# Altium PCB Datalogger_v3.PcbDoc
Units mm, origin at the board's own origin, x right, y up, seen from the top; angles counter-clockwise.
Board outline 73.03 x 72.52 mm, 2 copper layers (Top Layer, Bottom Layer); 8 components, 12 nets, 71 pads, 2 vias.
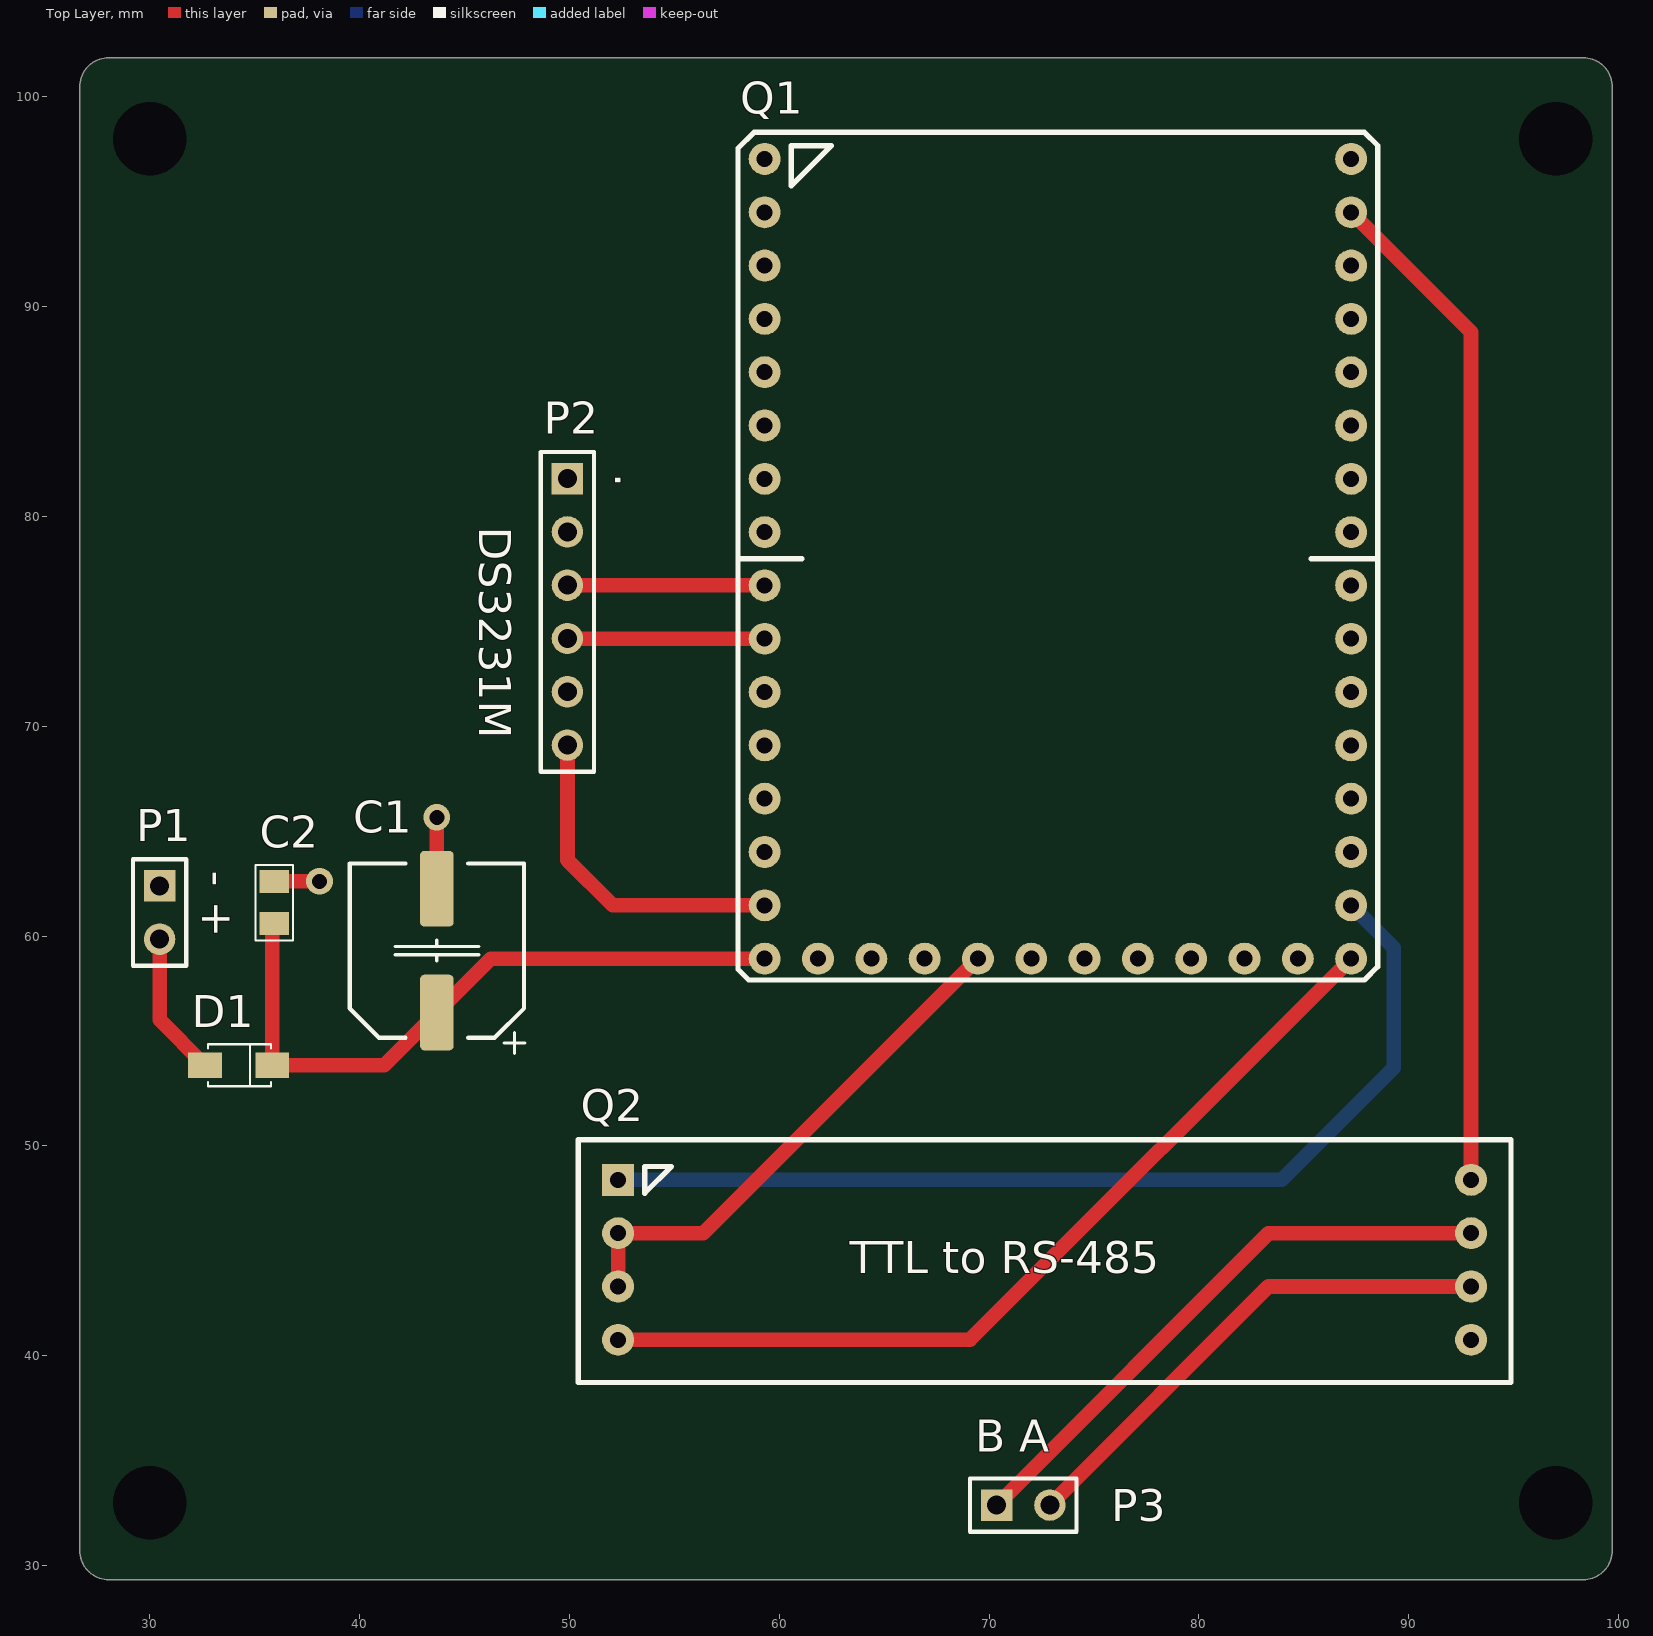
[diagram p0: Top Layer view]
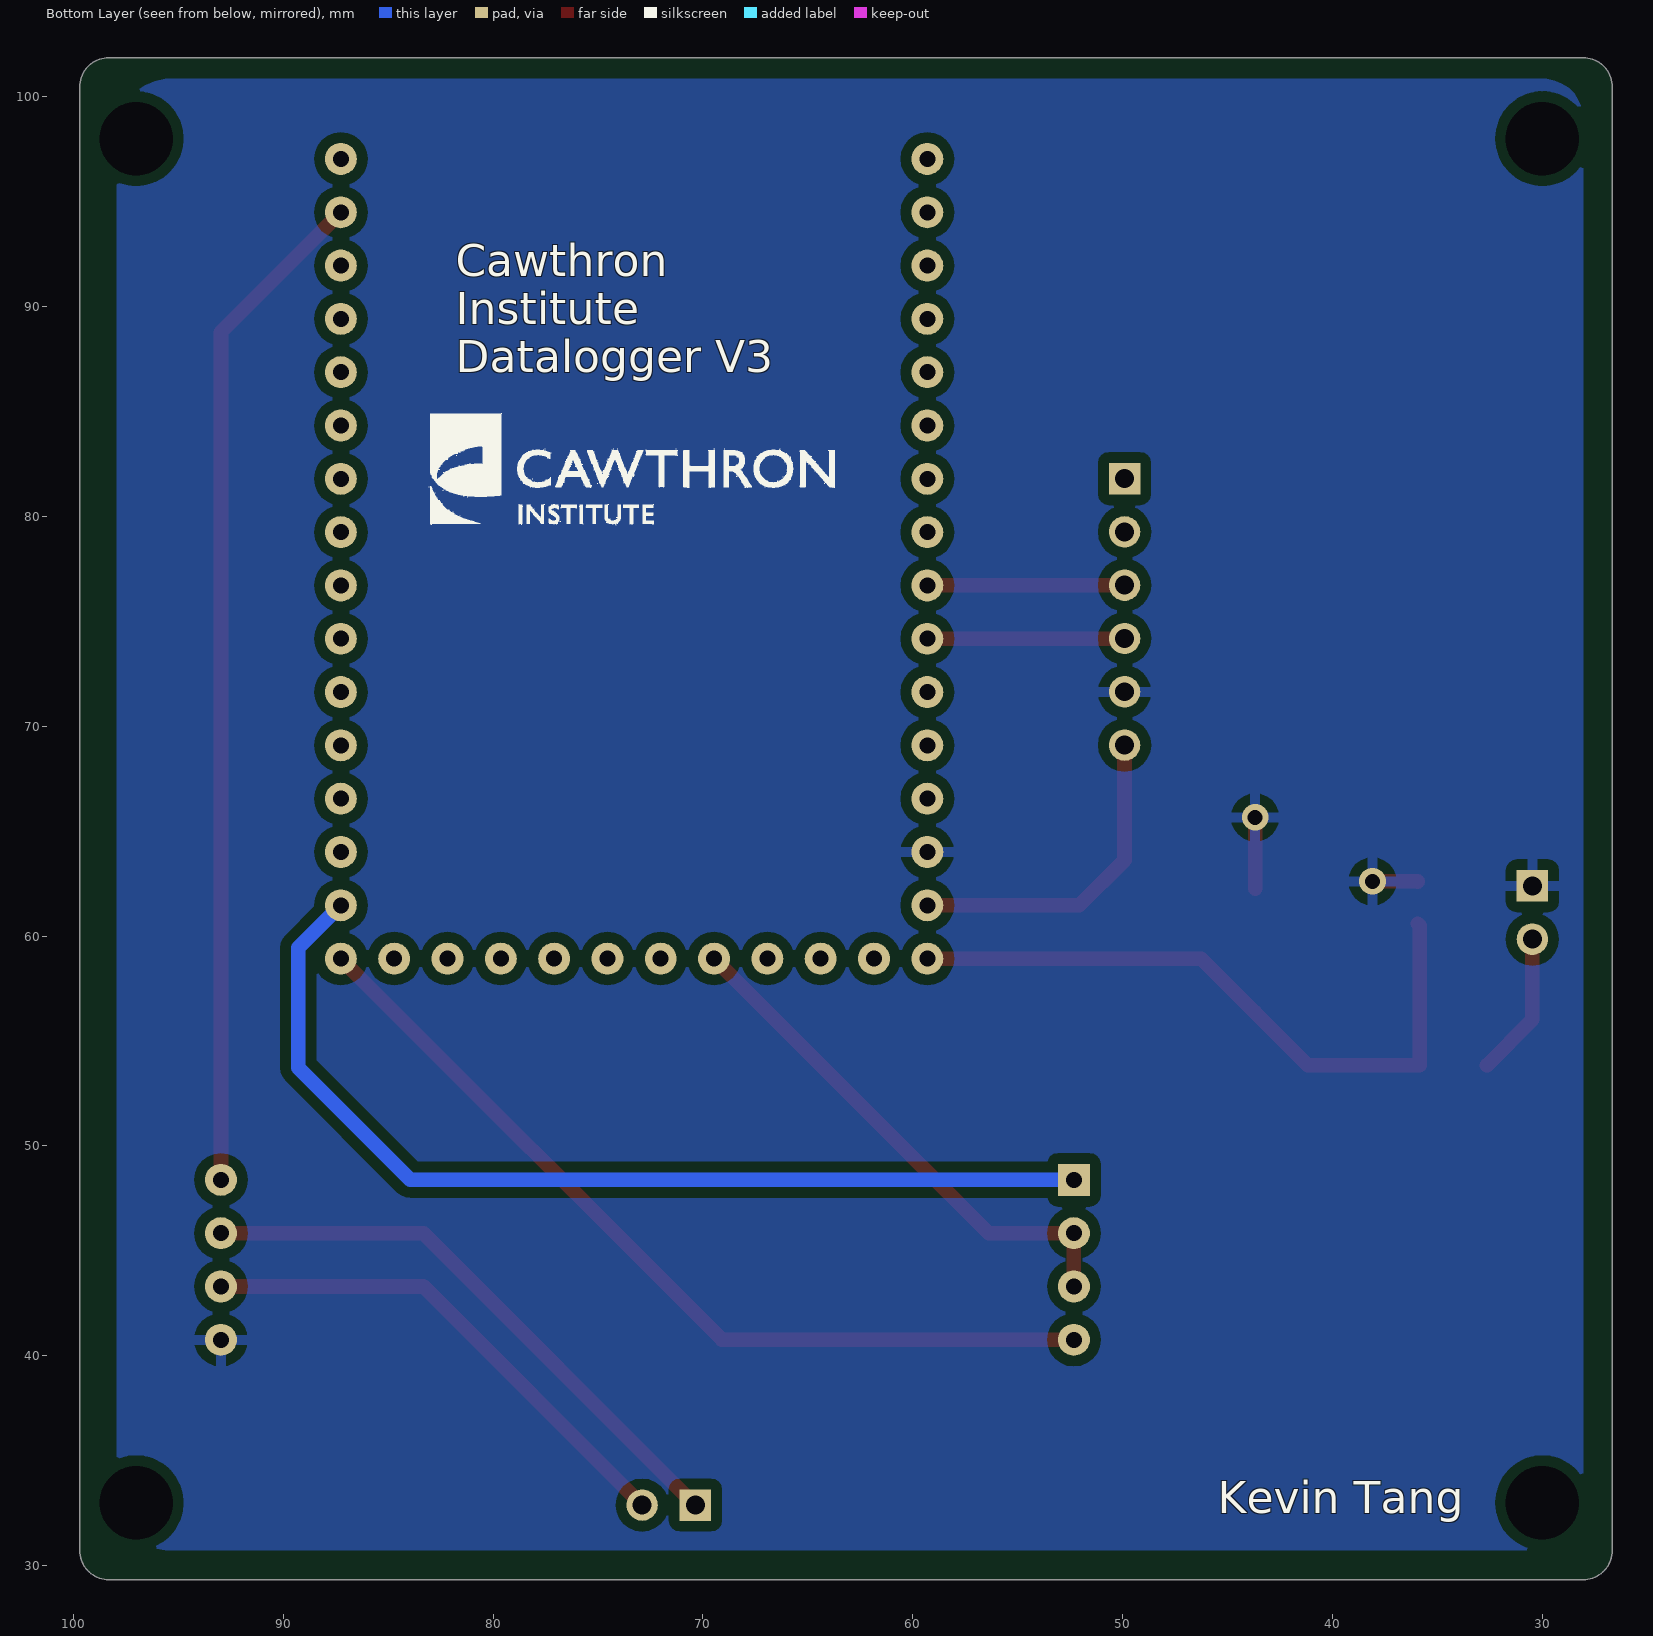
[diagram p1: Bottom Layer view, seen from below]

## Layer stack, top to bottom
Top Solder: solder mask 0.0102, Solder Resist, Dk 3.5
Top Layer: signal copper 0.0356
Dielectric 1: dielectric 0.32, FR-4, Dk 4.8
Bottom Layer: signal copper 0.0356
Bottom Solder: solder mask 0.0102, Solder Resist, Dk 3.5

## Board outline
26.67,30.734 26.67,100.457 cw(c28.067,100.457) 28.067,101.854 98.298,101.854 cw(c98.298,100.457) 99.695,100.457 99.695,30.734 cw(c98.298,30.734) 98.298,29.337 28.067,29.337 cw(c28.067,30.734)

## Design rules (kind name [scope] priority, off if disabled: settings)
Clearance [All] p1: gap=0.5 ignorepadtopadclearanceinfootprint=FALSE
HoleSize [All] p1: absolutevalues=TRUE maxlimit=6 minlimit=0.025 maxpercent=80.000 minpercent=20.000
PolygonConnect [All] p1: connectstyle=Relief reliefconductorwidth=0.5 reliefentries=4 polygonreliefangle="90 Angle" airgapwidth=0.5
RoutingVias [All] p1: holewidth=1 width=2.2 viastyle="Through Hole" minholewidth=0.6 minwidth=1.2 maxholewidth=0.7 maxwidth=1.7
SilkToSilkClearance [All] p1: silktosilkclearance=0.1
SilkToSolderMaskClearance [IsPad] p1: minsilkscreentomaskgap=0.1 clearancetoexposedcopper=TRUE
SolderMaskExpansion [All] p1: expansion=0.102
Width [All] p1: maxlimit=5 minlimit=0.5 preferedwidth=0.7
27 further rules are at their usual default settings.

## Components (designator, comment, footprint, x,y, rotation, side; value= is the part's Value field where it differs from the comment)
C1 "CAP ALUM 22UF 20% 50V SMD" "CAP POL 8x5.4mm SMT" 43.688,59.309 r90 top
C2 "100nF" "0805 CAP" 35.941,61.595 r90 top
D1 "1N4148W-7-F" SOD123 34.291,53.848 r0 top
P1 "Battery" HDR1X2 30.48,62.395 r270 top
P2 "DS3231M" HDR1X6 49.911,81.8 r270 top
P3 "A/B Connector" HDR1X2 70.358,32.893 r0 top
Q1 "PYBv1.1" PCBComponent_1#1 59.309,58.928 r0 top
Q2 "TTL to RS485" PCBComponent_1#2 52.324,40.767 r0 top

## Footprints (in the part's own frame and the unit in brackets; to place one, negate y for a bottom-side part, rotate by r counter-clockwise, add the part's x,y. Pads: shape width x height; smd on the part's side, far side on the other; paste and mask are expansions set on the pad)
"0805 CAP" [mm] "http://www.digikey.co.nz/Web%20Export/Supplier%20Content/Vishay_8026/PDF/VishayBeyschlag_SolderPad.pdf?redirected=1 with dimension G modified by +0.25mm"
  rect 1.1x1.4 smd: 1(-1,0) 2(1,0)
  silkscreen extent -1.8,-0.9 1.8,0.9, body extent -1.04,-0.66 1.04,0.66, height 0.61
"CAP POL 8x5.4mm SMT" [mm]
  round 0.508 on Mech15: 0(0,0)
  rrect25% 3.6x1.6 smd: 1(-2.95,0) 2(2.95,0)
  silkscreen extent -4.9,-4.2 4.15,4.15, body extent -4.5,-4.15 4.5,4.15, height 5.4
HDR1X2 [mm] "Connector; Header; 2 Position"
  rect 1.5x1.5 hole 0.9: 1(0,0)
  round 1.5 hole 0.9: 2(2.54,0)
  silkscreen extent -1.27,-1.27 3.81,1.27
HDR1X6 [mm] "Connector; Header; 6 Position"
  rect 1.5x1.5 hole 0.9: 1(0,0)
  round 1.5 hole 0.9: 2(2.54,0) 3(5.08,0) 4(7.62,0) 5(10.16,0) 6(12.7,0)
  silkscreen extent -1.27,-1.27 13.97,1.27
PCBComponent_1#1 [mil]
  round 60 hole 30: 1(0,1500) 2(0,1400) 3(0,1300) 4(0,1200) 5(0,1100) 6(0,1000) 7(0,900) 8(0,800) 9(0,700) 10(0,600) 11(0,500) 12(0,400) 13(0,300) 14(0,200) 15(0,100) 16(0,0) 17(1100,1500) 18(1100,1400) 19(1100,1300) 20(1100,1200) 21(1100,1100) 22(1100,1000) 23(1100,900) 24(1100,800) 25(1100,700) 26(1100,600) 27(1100,500) 28(1100,400) 29(1100,300) 30(1100,200) 31(1100,100) 32(1100,0) 33(100,0) 34(200,0) 35(300,0) 36(400,0) 37(500,0) 38(600,0) 39(700,0) 40(800,0) 41(900,0) 42(1000,0)
  silkscreen extent -50,-40 1150,1550
PCBComponent_1#2 [mil]
  rect 60x60 hole 30: 1(0,300)
  round 60 hole 30: 2(0,200) 4(0,0) 5(1600,300) 6(1600,200) 7(1600,100) 8(1600,0)
  round 60 hole 30 mask+4: 3(0,100)
  silkscreen extent -75,-80 1675,375
SOD123 [mm] "SOD-123; 2 Leads; Body 2.7 x 1.6 mm, (LxW)"
  rect 1.6x1.2 smd: 1(-1.65,0) 2(1.55,0)
  silkscreen extent -1.5,-1 1.5,1, body extent -1.8,-0.86 1.8,0.86, height 1.21

## Part data
C1: library part "SMT-CAP 22uF/35V SM", Capacitance 1="47 µF", ESR (Equivalent Series Resistance)=-, Lifetime @ Temp.="2000 Hrs @ 85°C", Manufacturer=Nichicon, Manufacturer Part Number=UWX1V220MCL1GB, Operating Temperature="-40°C ~ 85°C", Package / Case="Radial, Can - SMD", Supplier Part Number 1=493-2118-1-ND, Tolerance=±20%, Applications="General Purpose", Category=Capacitors, ComponentLink1Description=http://nichicon-us.com/english/products/pdfs/e-uwx.pdf, ComponentLink1URL=http://nichicon-us.com/english/products/pdfs/e-uwx.pdf, Height - Seated (Max)="0.213\" (5.40mm)", Lead Spacing=-, Mounting Type="Surface Mount", Packaging="Cut Tape (CT)", Part Status=Active, Polarization=Polar, Pricing 1="1=0.59, 10=0.406, 100=0.2304, 500=0.16268 (NZD)", Ratings=-, Revision="July-2002: Re-released for DXP Platform.", RoHS="RoHS Compliant", Size / Dimension="0.248\" Dia (6.30mm)", Stock 1=680, Supplier 1=Digi-Key, Surface Mount Land Size="0.260\" L x 0.260\" W (6.60mm x 6.60mm)"
C2: library part "SMT- Cap", "SMT Capacitor Non Polarised"
D1: library part "SMT-Diode 1N4148W-7-F", "DIODE GEN PURP 100V 300MA SOD123", Base Part Number=1N4148W, Capacitance @ Vr, F="2pF @ 0V, 1MHz", Current - Average Rectified (Io)=150mA, Manufacturer="Diodes Incorporated", Manufacturer Part Number=1N4148W-13-F, Operating Temperature - Junction="-65°C ~ 150°C", Package / Case=SOD-123, Supplier Part Number 1=1N4148W-13FDICT-ND, Category="Discrete Semiconductor Products", ComponentLink1Description=https://www.diodes.com/assets/Datasheets/ds30086.pdf, ComponentLink1URL=https://www.diodes.com/assets/Datasheets/ds30086.pdf, Diode Type=Standard, Mounting Type="Surface Mount", Packaging="Cut Tape (CT)", Part Status=Active, Pricing 1="1=0.33, 10=0.292, 100=0.1586, 500=0.0976, 1000=0.06656 (NZD)", RoHS="RoHS Compliant", Speed="Small Signal =< 200mA (Io), Any Speed", Stock 1=5282, Supplier 1=Digi-Key, Supplier Device Package=SOD-123
P1 P3: library part "Header 2", "Header, 2-Pin", LatestRevisionDate=17-Jul-2002, LatestRevisionNote="Re-released for DXP Platform.", Publisher="Altium Limited"
P2: library part "Header 6", "Header, 6-Pin", LatestRevisionDate=17-Jul-2002, LatestRevisionNote="Re-released for DXP Platform.", Publisher="Altium Limited"
Q1: "Microcontroller"
Q2: "Converter"

## Free pads (board coordinates)
  round 1.524 hole 3.5: 2(30,98) 3(97,98) 4(30,33) 5(97,33)

## Via types
v1: diameter 1.27, hole 0.711, Top Layer to Bottom Layer, 2 vias

## Nets (pads, with @x,y where several pads share a name; then routed paths per layer and width w, separated by ;. In a path a pad name is that pad's centre, name@x,y a point inside that pad or via, vN(x,y) a via of type N, cw(c..) or ccw(c..) an arc to the next point about the centre after c; other vN are vias at no path point)
GND: C1.2 C2.2 P1.1 P2.5 Q1.14 Q2.8 | length 5.6
  Top Layer w0.7: C2.2 35.941,62.611 v1(38.1,62.611) ; C1.2 v1(43.688,65.659)
NetC1_1: C1.1 C2.1 D1.2 Q1.16 | length 32.4
  Top Layer w0.7: C2.1 35.841,60.495 D1.2 41.177,53.848 C1.1 46.257,58.928 Q1.16
NetD1_1: D1.1 P1.2 | length 6.9
  Top Layer w0.7: P1.2 30.48,56.009 D1.1
NetP2_3: P2.3 Q1.9 | length 9.4
  Top Layer w0.7: P2.3 59.297,76.72 Q1.9
NetP2_4: P2.4 Q1.10 | length 9.4
  Top Layer w0.7: P2.4 49.923,74.168 Q1.10
NetP3_1: P3.1 Q2.6 | length 28
  Top Layer w0.7: P3.1 83.312,45.847 Q2.6
NetP3_2: P3.2 Q2.7 | length 24.4
  Top Layer w0.7: P3.2 83.312,43.307 Q2.7
NetQ1_31: Q1.31 Q2.1 | length 47.8
  Bottom Layer w0.7: Q2.1 83.947,48.387 89.281,53.721 89.281,59.436 Q1.31
NetQ1_32: Q1.32 Q2.4 | length 42.4
  Top Layer w0.7: Q2.4 69.088,40.767 Q1.32
NetQ1_36: Q1.36 Q2.2 Q2.3 | length 25.1
  Top Layer w0.7: Q2.3 Q2.2 56.388,45.847 Q1.36
VCC: P2.6 Q1.15 | length 15.8
  Top Layer w0.7: P2.6 49.911,63.627 52.07,61.468 Q1.15
VCC1: Q1.18 Q2.5 | length 48.5
  Top Layer w0.7: Q1.18 92.964,88.773 Q2.5
pads on no net: C1.0 P2.1 P2.2 Q1.1 Q1.2 Q1.3 Q1.4 Q1.5 Q1.6 Q1.7 Q1.8 Q1.11 Q1.12 Q1.13 Q1.17 Q1.19 Q1.20 Q1.21 Q1.22 Q1.23 Q1.24 Q1.25 Q1.26 Q1.27 Q1.28 Q1.29 Q1.30 Q1.33 Q1.34 Q1.35 Q1.37 Q1.38 Q1.39 Q1.40 Q1.41 Q1.42

## Polygon pours and split planes (outlines as drawn)
GND on Bottom Layer "GND Plane" (solid, pour order 0): 95.377,100.838 cw(c95.377,98.298) 97.917,98.298 97.917,33.274 cw(c95.377,33.274) 95.377,30.734 29.972,30.734 cw(c29.972,32.639) 28.067,32.639 28.067,98.933 cw(c29.972,98.933) 29.972,100.838

## Silkscreen, mask and mechanical layers (free items; w line width, h text height)
Top Overlay:
  text "." at 52.197,82.042 h1.52 r270
  text "DS3231M" at 45.72,79.502 h1.52 r270
  text "- +" at 32.512,63.119 h1.52 r270
  text "B A" at 69.342,35.433 h1.52
Bottom Overlay:
  drawing of 1887 lines, arcs and shapes, not listed
  text "Cawthron / Institute / Datalogger V3" at 81.788,86.868 h1.52
  text "Kevin Tang" at 45.466,32.512 h1.52
Mechanical 1:
  lines w0.254: 71.12,101.727 98.298,101.727 cw(c98.298,100.457) 99.568,100.457 99.568,30.734 cw(c98.298,30.734) 98.298,29.464 28.067,29.464 cw(c28.067,30.734) 26.797,30.734 26.797,100.457 cw(c28.067,100.457) 28.067,101.727 71.501,101.727

## Text inside footprints (layer, text, board x,y; h text height)
Q2: Top Overlay "TTL to RS-485" at 63.373,43.942 h1.52